# Altium PCB 超声波接近电路3-21PcbDoc.PcbDoc
Units mil, origin at the board's own origin, x right, y up, seen from the top; angles counter-clockwise.
Board outline 2495 x 1260 mil, 2 copper layers (Top Layer 1, Bottom Layer 1), stack 26.556 mil thick; 50 components, 104 nets, 237 pads, 87 vias.
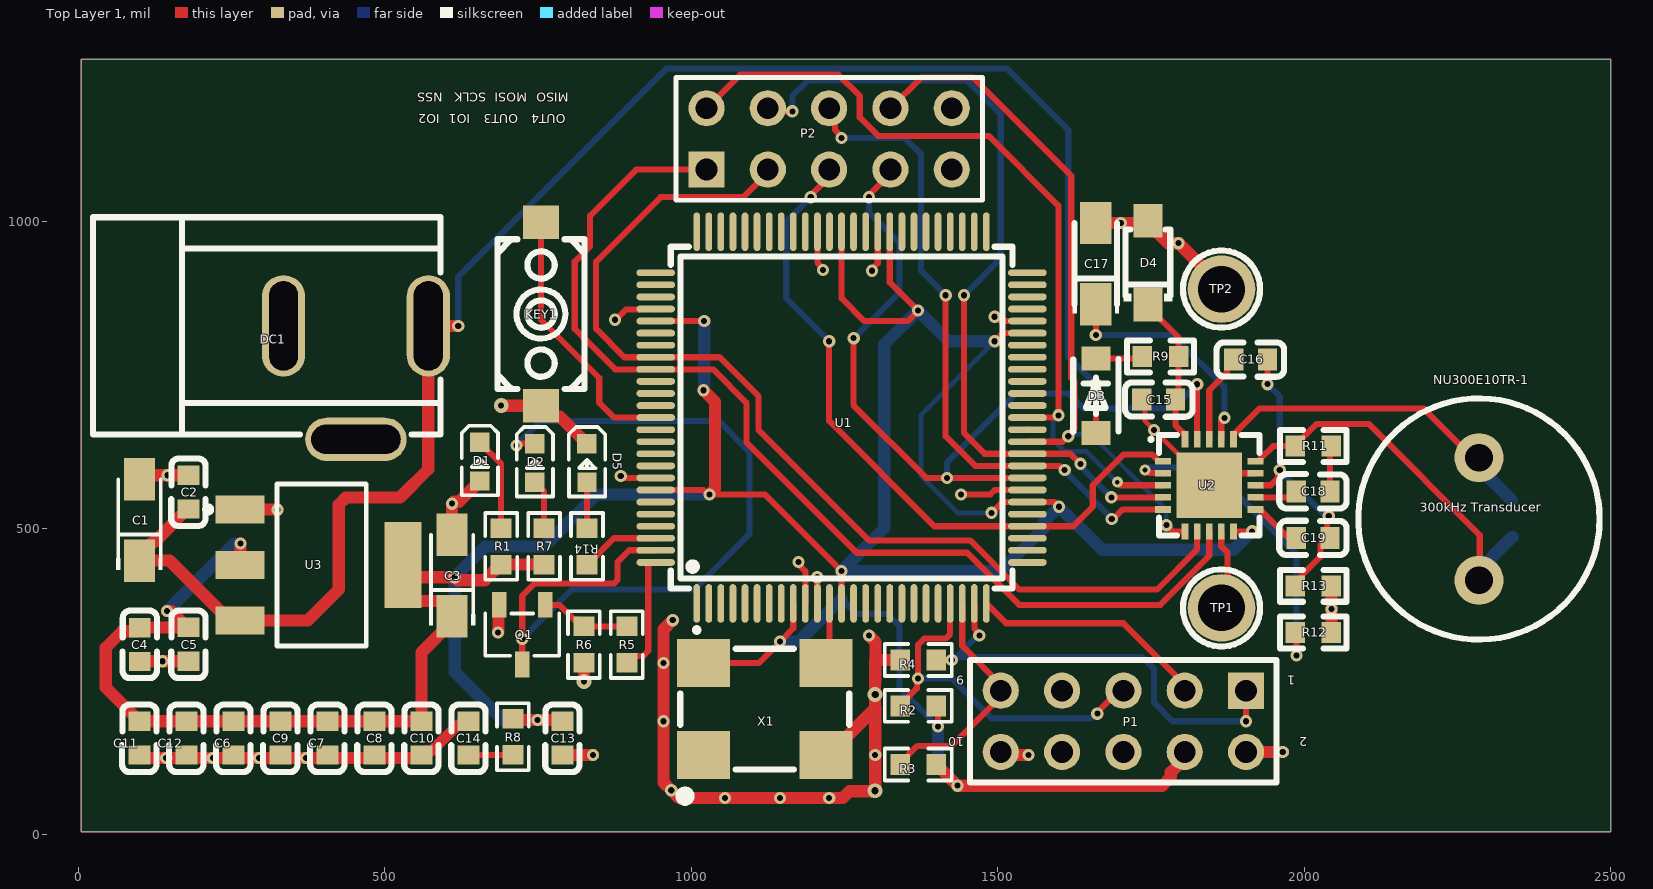
[diagram p0: Top Layer 1 view]
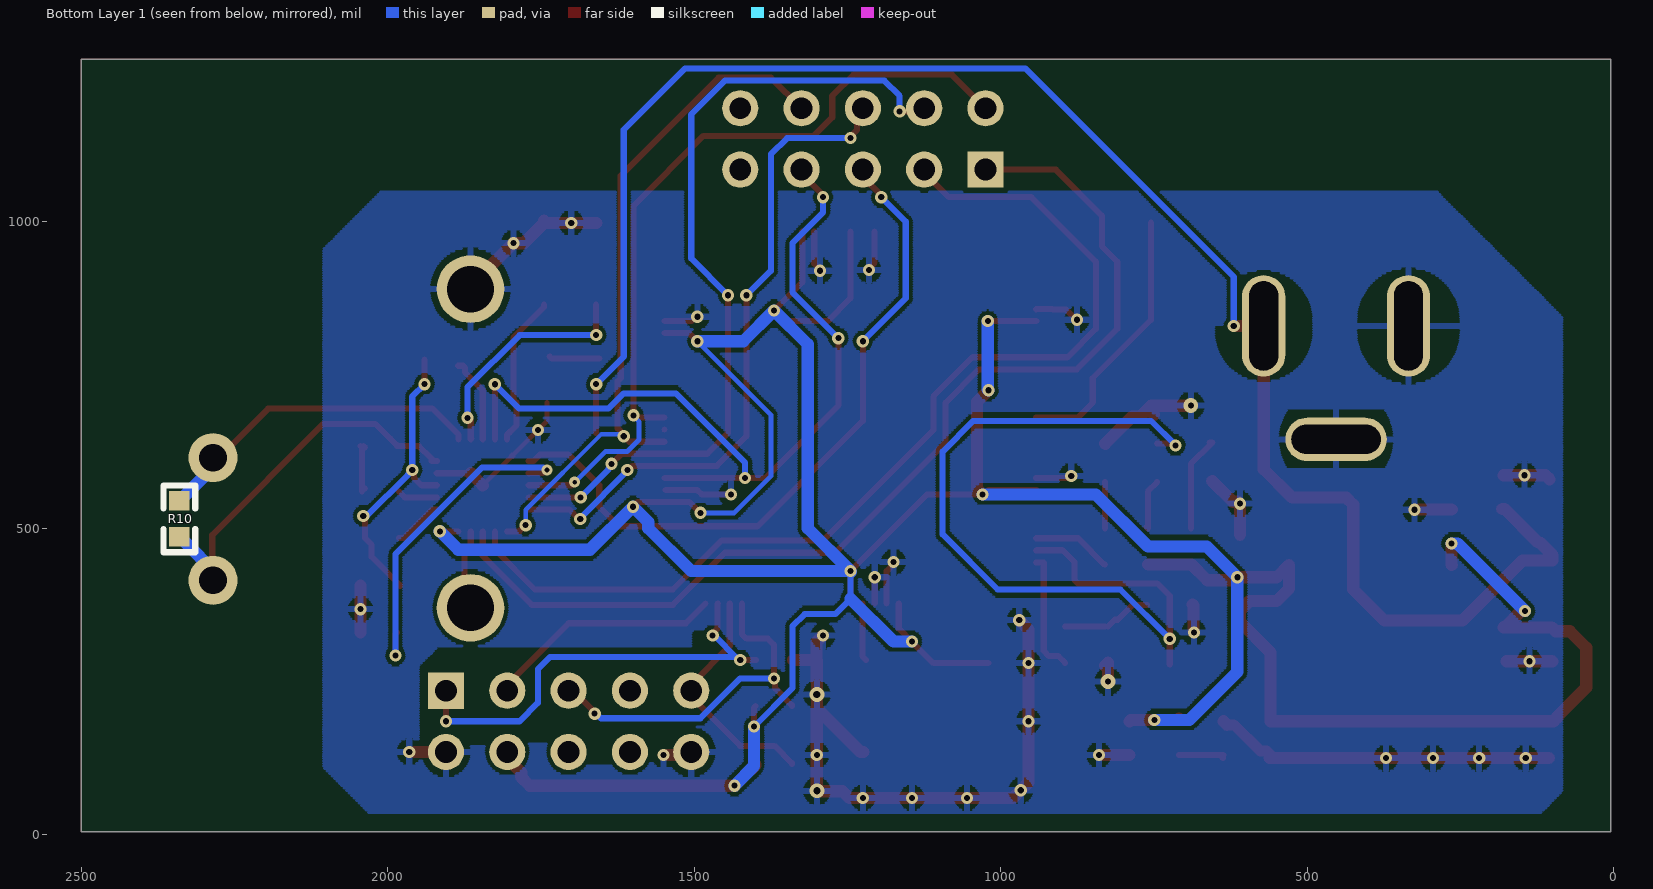
[diagram p1: Bottom Layer 1 view, seen from below]

## Layer stack, top to bottom
Top Solder: solder mask 0.4, Solder Resist, Dk 3.5
Top Layer 1: signal copper 1.378
Dielectric 4: prepreg 2.8, PP-006, Dk 4.1
Dielectric 2: prepreg 2.8, PP-006, Dk 4.1
Dielectric 1: dielectric 12.6, FR-4, Dk 4.8
Dielectric 3: prepreg 2.8, PP-006, Dk 4.1
Dielectric 5: prepreg 2.8, PP-006, Dk 4.1
Bottom Layer 1: signal copper 1.378
Bottom Solder: solder mask 0.4, Solder Resist, Dk 3.5

## Board outline
5,5 2500,5 2500,1265 5,1265

## Design rules (kind name [scope] priority, off if disabled: settings)
Clearance [All] p1: gap=6 ignorepadtopadclearanceinfootprint=FALSE except(0: Arc-Hole Track-Hole SMDPad-Hole THPad-Hole Via-Hole Fill-Hole Poly-Hole Region-Hole Text-Hole)
PolygonConnect [All] p1: connectstyle=Relief reliefconductorwidth=10 reliefentries=4 polygonreliefangle="90 Angle" airgapwidth=10
RoomDefinition 超声波接近电路3-21 [InComponentClass('超声波接近电路3-21')] p1: confinementstyle=ConfineIn formatcopy=TRUE lockcomponents=FALSE outline -4235,-1000 -2235,-1000 -2235,0 -4235,0
RoutingVias [All] p1: holewidth=28 width=50 viastyle="Through Hole" minholewidth=28 minwidth=50 maxholewidth=28 maxwidth=50
SolderMaskExpansion [All] p1: expansion=4 istentingtop=FALSE
Width PWR_Width [InNet('VCC3.3')] p1: maxlimit=20 minlimit=20 preferedwidth=20
Width GND_Width [InNet('GND')] p2: maxlimit=20 minlimit=20 preferedwidth=20
Width NORMAL [All] p3: maxlimit=10 minlimit=10 preferedwidth=10
30 further rules are at their usual default settings.

## Components (designator, comment, footprint, x,y, rotation, side; value= is the part's Value field where it differs from the comment)
"300kHz Transducer" "NU300E10TR-1" NU300E10TR-1 2285,415 r0 top
C1 "100uF" CAP-SMD_L3.2-W1.6-RD 100,457.22 r90 top
C2 "100nF" C0603 180,531.32 r90 top
C3 "100uF" CAP-SMD_L3.2-W1.6-RD 610,366.5 r90 top
C4 "100nF" C0603 100.46,337.7 r270 top
C5 "10nF" C0603 180,283.2 r90 top
C6 "10nF" C0603 253.33,130 r90 top
C7 "10nF" C0603 406.67,130 r90 top
C8 "10nF" C0603 483.33,130 r90 top
C9 "10nF" C0603 330,130 r90 top
C10 "10nF" C0603 560,130 r90 top
C11 "10nF" C0603 100,130 r90 top
C12 "10nF" C0603 176.67,130 r90 top
C13 "100nF" C0603 790,130 r90 top
C14 "100nF" C0603 636.67,130 r90 top
C15 "100nF" C0603 1790,710 r180 top
C16 "3.3nF" C0603 1884.89,775 r0 top
C17 "2.2uF" CAP-SMD_L3.2-W1.6-RD 1660,875 r90 top
C18 "330pF" C0603 1986.91,559.95 r0 top
C19 "15nF" C0603 1986.91,483.95 r0 top
D1 "LED0" LED0603-RD_RED 540,680 r270 top
D2 "MHT192UGCT" LED0603-RD_GREEN 704.72,677.95 r270 top
D3 "1N4001W" SOD-123F_L2.8-W1.8-LS3.7-RD 1465,695 r270 top
D4 "SMF36A_C353286" SOD-123FL_L2.7-W1.8-LS3.8-RD -1945.81,6041.63 r90 top
D5 "MHT192UGCT" LED0603-RD_GREEN 789.72,677.95 r270 top
DC1 "DC-005-2.5A-2.5" CONN-TH_DC-005-2.5A-2.0 335,830 r0 top
KEY1 "K2-3.6×6.1_SMD" KEY-SMD_2P-L6.2-W3.6-LS8.0 755,849.31 r270 top
P1 "Header 5X2" HDR2X5 1905,235 r180 top
P2 "Header 5X2" HDR2X5 1025,1085 r0 top locked
Q1 "BC817-40,215" SOT-23-3_L2.9-W1.6-P1.90-LS2.8-BR 50723.47,-27657.24 r90 top
R1 "1KΩ" R0603 650,615 r270 top
R2 "1KΩ" R0603 1225.69,170.13 r0 top
R3 "1KΩ" R0603 1225.69,74.51 r0 top
R4 "1KΩ" R0603 1225.69,245 r0 top
R5 "470Ω" R0603 935,165.57 r90 top
R6 "20kΩ" R0603 865,165.57 r90 top
R7 "4.7kΩ" R0603 720,615 r270 top
R8 "1KΩ" R0603 749.17,15.09 r90 top
R9 "10Ω" R0603 1620.69,740 r0 top
R10 "10kΩ" R0603 2300,370.69 r90 bottom
R11 "200Ω" R0603 2159.31,674.01 r180 top
R12 "0Ω" R0603 1870,290 r0 top
R13 "0Ω" R0603 1870,366 r0 top
R14 "1KΩ" R0603 790,615 r270 top
TP1 "5009" TEST-TH_BD3.18-P1.93 1905,330 r0 top
TP2 "5009" TEST-TH_BD3.18-P1.93 1905,850 r0 top
U1 "EPM240T100C5N" TQFP-100_L14.0-W14.0-P0.50-LS16.0-BL 1360,620 r0 top locked
U2 "TUSS4470TRTJR" QFN-20_L4.0-W4.0-P0.50-TL-EP2.7 -46561.58,-47901.66 r0 top
U3 "REG1117-3" ZZ311 335,400 r270 top
X1 "24MHz" OSC-SMD_4P-L7.0-W5.0-BL_SIT1602 1060,-65 r0 top

## Footprints (in the part's own frame and the unit in brackets; to place one, negate y for a bottom-side part, rotate by r counter-clockwise, add the part's x,y. Pads: shape width x height; smd on the part's side, far side on the other; paste and mask are expansions set on the pad)
C0603 [mm]
  rect 0.8x0.9 smd: 1(0,0) 2(1.4,0)
  silkscreen extent -0.71,-0.71 2.09,0.72
CAP-SMD_L3.2-W1.6-RD [mil]
  rect 69.19x51.02 smd: 1(-10,0) 2(122.78,0)
  silkscreen extent -25,-37 122,37
CONN-TH_DC-005-2.5A-2.0 [mm]
  oval 1.8x4.2 hole 1.2 slot 3.7 at 90 deg: 1(5.999,0) 2(0,0)
  oval 4.2x1.8 hole 1.2 slot 3.7 at 0 deg: 3(3,-4.7)
  silkscreen extent -7.9,-4.5 6.5,4.5
HDR2X5 [mm] "Connector; Header; 5x2 Position"
  rect 1.5x1.5 hole 0.9: 1(0,0)
  round 1.5 hole 0.9: 2(0,2.54) 3(2.54,0) 4(2.54,2.54) 5(5.08,0) 6(5.08,2.54) 7(7.62,0) 8(7.62,2.54) 9(10.16,0) 10(10.16,2.54)
  silkscreen extent -1.27,-1.27 11.43,3.81
KEY-SMD_2P-L6.2-W3.6-LS8.0 [mm]
  rect 1.4x1.5 smd: 1(-3.8,0) 2(3.8,0)
  silkscreen extent -3.1,-1.8 3.1,1.8
LED0603-RD_GREEN [mm]
  rect 0.8x0.8 smd: 1(1.016,1.016) 2(2.615,1.023)
  silkscreen extent 0.33,0.27 3.21,1.78
LED0603-RD_RED [mm]
  rect 0.8x0.8 smd: 1(1.016,2.921) 2(2.615,2.928)
  silkscreen extent 0.33,2.18 3.21,3.68
NU300E10TR-1 [mil]
  round 80 hole 45: 1(0,200) 2(0,0)
  silkscreen extent -197,-97 197,297
OSC-SMD_4P-L7.0-W5.0-BL_SIT1602 [mil]
  rect 86.61x78.74 smd: 1(-40,195) 2(160,195) 3(160,345) 4(-40,345)
  silkscreen extent -78,120 198,368
QFN-20_L4.0-W4.0-P0.50-TL-EP2.7 [mm]
  rect 0.665x0.28 smd: 1(1227.62,1232.18) 2(1227.62,1231.68) 3(1227.62,1231.18) 4(1227.62,1230.68) 5(1227.62,1230.18) 11(1231.435,1230.18) 12(1231.435,1230.68) 13(1231.435,1231.18) 14(1231.435,1231.68) 15(1231.435,1232.18)
  rect 0.28x0.665 smd: 6(1228.527,1229.273) 7(1229.027,1229.273) 8(1229.527,1229.273) 9(1230.027,1229.273) 10(1230.527,1229.273) 16(1230.527,1233.088) 17(1230.027,1233.088) 18(1229.527,1233.088) 19(1229.027,1233.088) 20(1228.527,1233.088)
  rect 2.7x2.7 smd: 21(1229.527,1231.18)
  silkscreen extent 1227.04,1229.1 1231.6,1233.26
R0603 [mil]
  rect 31.75x34.02 smd: 1(115,40) 2(174.31,40)
  silkscreen extent 90,14 199,66
SOD-123F_L2.8-W1.8-LS3.7-RD [mm]
  rect 1x1.2 smd: 1(-2.084,4.953) 2(1.016,4.953)
  silkscreen extent -2.05,4.02 0.96,5.9
SOD-123FL_L2.7-W1.8-LS3.8-RD [mm]
  rect 1.4x1.2 smd: 1(-131.486,-93.747) 2(-128.017,-93.747)
  silkscreen extent -131.36,-94.75 -128.38,-92.74
SOT-23-3_L2.9-W1.6-P1.90-LS2.8-BR [mm]
  rect 1.07x0.6 smd: 1(712.019,1269.025) 2(712.019,1270.925) 3(709.549,1269.975)
  silkscreen extent 709.91,1268.44 711.66,1271.51
TEST-TH_BD3.18-P1.93 [mm]
  round 2.8 hole 1.93: 1(-1.016,1.016)
  silkscreen extent -2.62,-0.58 0.58,2.61
TQFP-100_L14.0-W14.0-P0.50-LS16.0-BL [mm]
  oval 0.28x1.6 smd: 1(-8.915,-6.166) 2(-8.415,-6.166) 3(-7.915,-6.166) 4(-7.415,-6.166) 5(-6.915,-6.166) 6(-6.415,-6.166) 7(-5.915,-6.166) 8(-5.415,-6.166) 9(-4.915,-6.166) 10(-4.415,-6.166) 11(-3.915,-6.166) 12(-3.415,-6.166) 13(-2.915,-6.166) 14(-2.415,-6.166) 15(-1.915,-6.166) 16(-1.415,-6.166) 17(-0.915,-6.166) 18(-0.415,-6.166) 19(0.085,-6.166) 20(0.585,-6.166) 21(1.085,-6.166) 22(1.585,-6.166) 23(2.085,-6.166) 24(2.585,-6.166) 25(3.085,-6.166) 51(3.085,9.234) 52(2.585,9.234) 53(2.085,9.234) 54(1.585,9.234) 55(1.085,9.234) 56(0.585,9.234) 57(0.085,9.234) 58(-0.415,9.234) 59(-0.915,9.234) 60(-1.415,9.234) 61(-1.915,9.234) 62(-2.415,9.234) 63(-2.915,9.234) 64(-3.415,9.234) 65(-3.915,9.234) 66(-4.415,9.234) 67(-4.915,9.234) 68(-5.415,9.234) 69(-5.915,9.234) 70(-6.415,9.234) 71(-6.915,9.234) 72(-7.415,9.234) 73(-7.915,9.234) 74(-8.415,9.234) 75(-8.915,9.234)
  oval 1.6x0.28 smd: 26(4.785,-4.466) 27(4.785,-3.966) 28(4.785,-3.466) 29(4.785,-2.966) 30(4.785,-2.466) 31(4.785,-1.966) 32(4.785,-1.466) 33(4.785,-0.966) 34(4.785,-0.466) 35(4.785,0.034) 36(4.785,0.534) 37(4.785,1.034) 38(4.785,1.534) 39(4.785,2.034) 40(4.785,2.534) 41(4.785,3.034) 42(4.785,3.534) 43(4.785,4.034) 44(4.785,4.534) 45(4.785,5.034) 46(4.785,5.534) 47(4.785,6.034) 48(4.785,6.534) 49(4.785,7.034) 50(4.785,7.534) 76(-10.615,7.534) 77(-10.615,7.034) 78(-10.615,6.534) 79(-10.615,6.034) 80(-10.615,5.534) 81(-10.615,5.034) 82(-10.615,4.534) 83(-10.615,4.034) 84(-10.615,3.534) 85(-10.615,3.034) 86(-10.615,2.534) 87(-10.615,2.034) 88(-10.615,1.534) 89(-10.615,1.034) 90(-10.615,0.534) 91(-10.615,0.034) 92(-10.615,-0.466) 93(-10.615,-0.966) 94(-10.615,-1.466) 95(-10.615,-1.966) 96(-10.615,-2.466) 97(-10.615,-2.966) 98(-10.615,-3.466) 99(-10.615,-3.966) 100(-10.615,-4.466)
  silkscreen extent -9.99,-7.37 4.16,8.61
ZZ311 [mil]
  rect 45x80 smd: 1(-130.55,-70.74) 2(-40,-70.74) 3(50.55,-70.74)
  rect 140x60 smd: 4(-40,195)
  silkscreen extent -172,-128 92,135

## Part data
C1 C3: library part 100uF_1, "Polarized Capacitor (Radial)", LatestRevisionDate=17-Jul-2002, LatestRevisionNote="Re-released for DXP Platform.", PackageReference=RB7.6-15, Published=8-Jun-2000, Publisher="Altium Limited"
C2 C4 C5 C6 C7 C8 C9 C10 C11 C12 C13: "Capacitor", LatestRevisionDate=17-Jul-2002, LatestRevisionNote="Re-released for DXP Platform.", PackageReference=RAD-0.3, Published=8-Jun-2000, Publisher="Altium Limited"
C15: BOM_JLCPCB Part Class="Basic Part", BOM_Manufacturer=YAGEO, BOM_Manufacturer Part=CC0603KRX7R9BB104, BOM_Supplier=LCSC, BOM_Supplier Part=C14663, nameAlias=Capacitance, spicePre=C, spiceSymbolName=CC0603KRX7R9BB104
C16: BOM_JLCPCB Part Class="Extended Part", BOM_Manufacturer=MuRata, BOM_Manufacturer Part=GRM1885C1H332JA01D, BOM_Supplier=LCSC, BOM_Supplier Part=C77036, nameAlias=Capacitance, spicePre=C, spiceSymbolName=GRM1885C1H332JA01D
C17: library part 2.2uF_1, BOM_JLCPCB Part Class="Extended Part", BOM_Manufacturer=KEMET, BOM_Manufacturer Part=T491A225K035AT, BOM_Supplier=LCSC, BOM_Supplier Part=C122264, Contributor=LCSC, nameAlias=Capacitance, spicePre=C, spiceSymbolName=T491A225K035AT
C18: BOM_JLCPCB Part Class="Basic Part", BOM_Manufacturer=SAMSUNG, BOM_Manufacturer Part=CL10C331JB8NNNC, BOM_Supplier=LCSC, BOM_Supplier Part=C1664, nameAlias=Capacitance, spicePre=C, spiceSymbolName=CL10C331JB8NNNC
C19: BOM_JLCPCB Part Class="Extended Part", BOM_Manufacturer=YAGEO, BOM_Manufacturer Part=CC0603JRX7R9BB153, BOM_Supplier=LCSC, BOM_Supplier Part=C519550, Contributor=LCSC, nameAlias=Capacitance, spicePre=C, spiceSymbolName=CC0603JRX7R9BB153
D1: "Typical INFRARED GaAs LED", LatestRevisionDate=08-Jul-2005, LatestRevisionNote="Mech Layer 1 removed.", PackageReference=LED-0, Published=8-Jun-2000, Publisher="Altium Limited"
D2 D5: BOM_JLCPCB Part Class="Extended Part", BOM_Manufacturer=MEIHUA, BOM_Manufacturer Part=MHT192UGCT, BOM_Supplier=LCSC, BOM_Supplier Part=C389519, Contributor=LCSC, spicePre=L, spiceSymbolName=MHT192UGCT
D3: BOM_JLCPCB Part Class="Extended Part", BOM_Manufacturer=Jingdao, BOM_Manufacturer Part=1N4001W, BOM_Supplier=LCSC, BOM_Supplier Part=C162732, Contributor=LCSC, spicePre=D, spiceSymbolName=1N4001W
D4: BOM_JLCPCB Part Class="Extended Part", BOM_Manufacturer="Shandong Jingdao Microelectronics", BOM_Manufacturer Part=SMF36A, BOM_Supplier=LCSC, BOM_Supplier Part=C353286, Contributor=LCSC, spicePre=D, spiceSymbolName=SMF36A_C353286
DC1: BOM_JLCPCB Part Class="Extended Part", BOM_Manufacturer="XKB Enterprise", BOM_Manufacturer Part=DC-005-2.5A-2.5, BOM_Supplier=LCSC, BOM_Supplier Part=C319098, Contributor=LCSC, spicePre=D, spiceSymbolName=DC-005-2.5A-2.5
KEY1: BOM_Manufacturer Part=K2-1107ST-A4SW-06, BOM_Supplier=LCSC, BOM_Supplier Part=C118141, Contributor=LCEDA_Lib, spicePre=K, spiceSymbolName=K2-3.6×6.1_SMD, 制造商=韩国韩荣
P1 P2: "Header, 5-Pin, Dual row", LatestRevisionDate=17-Jul-2002, LatestRevisionNote="Re-released for DXP Platform.", Publisher="Altium Limited"
Q1: BOM_JLCPCB Part Class="Extended Part", BOM_Manufacturer=Nexperia, BOM_Manufacturer Part=BC817-40,215, BOM_Supplier=LCSC, BOM_Supplier Part=C52801, spicePre=Q, spiceSymbolName=BC817-40,215
R1 R2 R3 R4 R8 R14: "Resistor", LatestRevisionDate=17-Jul-2002, LatestRevisionNote="Re-released for DXP Platform.", PackageReference=AXIAL-0.4, Published=8-Jun-2000, Publisher="Altium Limited"
R5: BOM_JLCPCB Part Class="Extended Part", BOM_Manufacturer=UniOhm, BOM_Manufacturer Part=0603WAJ0471T5E, Resistance (Ohms)=470, BOM_Supplier=LCSC, BOM_Supplier Part=C25241, nameAlias=Resistance, spicePre=R, spiceSymbolName=0603WAJ0471T5E
R6: BOM_JLCPCB Part Class="Basic Part", BOM_Manufacturer=UniOhm, BOM_Manufacturer Part=0603WAF2002T5E, Resistance (Ohms)=20K, BOM_Supplier=LCSC, BOM_Supplier Part=C4184, nameAlias=Resistance, spicePre=R, spiceSymbolName=0603WAF2002T5E
R7: BOM_JLCPCB Part Class="Basic Part", BOM_Manufacturer=UniOhm, BOM_Manufacturer Part=0603WAF4701T5E, Resistance (Ohms)=4.7K, BOM_Supplier=LCSC, BOM_Supplier Part=C23162, nameAlias=Resistance, spicePre=R, spiceSymbolName=0603WAF4701T5E
R9: BOM_JLCPCB Part Class="Extended Part", BOM_Manufacturer=PANASONIC, BOM_Manufacturer Part=ERJPA3J100V, Resistance (Ohms)=10, BOM_Supplier=LCSC, BOM_Supplier Part=C441879, Contributor=LCSC, nameAlias=Resistance, spicePre=R, spiceSymbolName=ERJPA3J100V
R10: BOM_JLCPCB Part Class="Basic Part", BOM_Manufacturer=UniOhm, BOM_Manufacturer Part=0603WAF1002T5E, Resistance (Ohms)=10K, BOM_Supplier=LCSC, BOM_Supplier Part=C25804, nameAlias=Resistance, spicePre=R, spiceSymbolName=0603WAF1002T5E
R11: BOM_JLCPCB Part Class="Extended Part", BOM_Manufacturer=PANASONIC, BOM_Manufacturer Part=ERJ-PA3F2000V, Resistance (Ohms)=200, BOM_Supplier=LCSC, BOM_Supplier Part=C254528, Contributor=LCSC, nameAlias=Resistance, spicePre=R, spiceSymbolName=ERJ-PA3F2000V
R12 R13: library part 0_1, BOM_JLCPCB Part Class="Extended Part", BOM_Manufacturer=YAGEO, BOM_Manufacturer Part=RC0603JR-070RL, BOM_Supplier=LCSC, BOM_Supplier Part=C95177, nameAlias="Resistance (Ohms)", Resistance=0Ω, spicePre=R, spiceSymbolName=RC0603JR-070RL
TP1 TP2: BOM_JLCPCB Part Class="Extended Part", BOM_Manufacturer=Keystone, BOM_Manufacturer Part=5009, BOM_Supplier=LCSC, BOM_Supplier Part=C238126, Contributor=LCSC, spicePre=U, spiceSymbolName=5009
U1: "MAX II 3.3/2.5V CPLD, 80 IOs, 240 Logic Elements, 100-Pin Plastic TQFP, Commercial Temperature, Speed Grade 5, Pb-Free", Supplier Part Number 1=544-1964-ND, Code_JEDEC=MS-026-AED, ComponentLink1Description="Manufacturer Link", ComponentLink1URL=http://www.altera.com/products/devices/cpld/max2/mx2-index.jsp, ComponentLink2Description=Handbook, ComponentLink2URL=http://www.altera.com/literature/hb/max2/max2_mii5v1.pdf, ComponentLink3Description="Packaging Specification", ComponentLink3URL=http://www.altera.com/literature/ds/dspkg.pdf, DatasheetVersion="ver1.8, Jul-2006", LatestRevisionDate=13-Apr-2006, LatestRevisionNote="IPC-7351 Footprint Added.", Note="Each set of VCCIO pins can be connected to 3.3V, 2.5V, 1.8V, or 1.5V.", PackageDescription="100-Pin Plastic Thin Quad Flat Pack (TQFP100) - Wire Bond", PackageReference=TQFP100, PackageVersion="ver15.1, May-2008", Published=4-Mar-2005, Publisher="Altium Limited", Supplier 1=Digi-Key, Supplier 2=Farnell, Supplier 3=Farnell, Supplier Part Number 2=1662268, Supplier Part Number 3=1453503
U2: library part CMP-0081414-4, "Ultrasonic Sensor Signal Conditioner IC for Directly", Alternate Manufacturer="Texas Instruments", Alternate PartNumber=PGA44801RTJT, AEC Category=Q200, AEC Qualified=N, ComponentLink1Description="Datasheet Link", ComponentLink1URL=http://www.ti.com/lit/ds/symlink/pga448.pdf, ComponentLink2Description="Product Folder", ComponentLink2URL=http://www.ti.com/product/pga448, ComponentLink3Description="Online Datasheet", ComponentLink3URL=http://www.ti.com/product/pga448/datasheet, CompType=IC, Manufacturer="Texas Instruments", MountType=SMT, PackageDescription=WQFN-20, PackageReference=RTJ0020J, PartNumber=TUSS4470TRTJR, SizeArea_mm2=16, SizeAreaWB_mm2=25, SizeX_mm=4, SizeY_mm=4, SizeZ_mm=0.8
U3: "800mA Low Dropout Positive Regulator Fixed 2.85V,3V,3.3V and 5V", ComponentLink1Description="Manufacturer Link", ComponentLink1URL=http://www.ti.com/, ComponentLink2Description=Datasheet, ComponentLink2URL=http://www-s.ti.com/sc/ds/reg1117.pdf, DatasheetVersion=1994, LatestRevisionDate=17-Jul-2002, LatestRevisionNote="Re-released for DXP Platform.", PackageDescription="SOT-223/SC-73; 4 Leads; Body 6.7 x 7.3 mm, inc. leads (LxW max)", PackageReference=ZZ311, PackageVersion=revC, Published=8-Jun-2000, Publisher="Altium Limited"
X1: library part oscillator
C14: Contributor=LCEDA_Lib, nameAlias=Value(F), spicePre=C, spiceSymbolName=C_0603_US

## Via types
v1: diameter 20, hole 10, Top Layer 1 to Bottom Layer 1, tented both sides, 51 vias
v2: diameter 20, hole 10, Top Layer 1 to Bottom Layer 1, 30 vias
v3: diameter 24, hole 10, Top Layer 1 to Bottom Layer 1, 2 vias
v4: diameter 24, hole 12, Top Layer 1 to Bottom Layer 1, 2 vias
v5: diameter 18, hole 8, Top Layer 1 to Bottom Layer 1, tented both sides, 2 vias

## Nets (pads, with @x,y where several pads share a name; then routed paths per layer and width w, separated by ;. In a path a pad name is that pad's centre, name@x,y a point inside that pad or via, vN(x,y) a via of type N, cw(c..) or ccw(c..) an arc to the next point about the centre after c; other vN are vias at no path point)
DGND: R12.1 U2.2 | length 535.6
  Top Layer 1 w10: v5(1740,595) 1742.16,595 1746.97,590.2 1769.39,590.2 U2.2 ; R12.1 1987.5,327.5 v1(1987.5,292.5)
  Bottom Layer 1 w10: v5@1746.21,599.04 1845.96,599.04 1987.5,457.5 v1(1987.5,292.5)
GND: C1.2 C2.2 C3.2 C4.2 C5.1 C6.1 C7.1 C8.1 C9.1 C10.1 C11.1 C12.1 C13.1 C14.2 C15.2 C17.2 D1.2 D4.2 D5.1 DC1.2 DC1.3 KEY1.2 P1.2 P1.10 Q1.2 R4.1 R6.1 R12.2 R13.2 TP2.1 U1.10 U1.11 U1.32 U1.46 U1.60 U1.65 U1.79 U1.93 U2.14 U2.21 U3.1 X1.2 | length 3466.8
  Top Layer 1 w8: C15.2@1739.89,705 1739.89,675.11 v1(1755,660) 1796.85,618.15 U2.21
  Top Layer 1 w10: v1(875.7,840) 877.11,840 894.08,856.97 915.23,856.97 915.62,857.37 941.8,857.37 U1.79@942.08,857.09 ; v1@885,581.97 U1.93 ; v1(1175,445) 1175,441.21 1186.17,430.04 U1.10 ; U1.11@1205.63,377.48 v1(1205.63,420) ; U1.65 1205.86,933.2 1215,924.06 v1(1215,921.35) ; v1(1295,920) 1295,922.71 1304.29,932 U1.60 ; v1(1440,555) 1487.71,555 1495,562.29 U1.32@1547.19,562.29 ; v1(1495,845) 1497.71,845 1504.63,838.08 1548.18,838.08 U1.46 ; U2.21@1864.69,589.68 U2.14
  Top Layer 1 w18: C10.1 566.75,136.75 576.75,136.75 619.36,179.36 C14.2@630.92,179.36
  Top Layer 1 w20: C4.2 100.76,282.9 v1(137.73,282.9) 174.7,282.9 C5.1@175,283.2 ; C1.2@105,580 111.43,586.43 v1(145.71,586.43) C2.2 ; C11.1@105.67,125 v1(143.69,125) 181.71,125 v1(219.73,125) v1(371.8,125) C10.1@561.89,125 ; U3.1 324.45,530.55 v1(325,530) ; C3.2 v1(610,540) 613.02,543.02 621.24,543.02 D1.2 ; C14.2@630.92,179.36 C14.2 ; v1(685,330) 685.77,330.77 685.77,373.7 Q1.2 ; v3(690,700) 690.3,699.7 KEY1.2 772.56,682.14 785.53,682.14 D5.1 ; KEY1.2@750.3,685 KEY1.2@755,689.7 ; C13.1 v1(840,130) ; v3(825,250) R6.1 R6.1@830,275.57 ; v1(970,350) 955,335 v1(955,280) v1(955,185) 955,85 v1(967.5,72.5) 980,60 v1(1055,60) v1(1145,60) v1(1225,60) 1247.2,60 1258.04,70.84 1299.13,70.84 v4(1299.89,71.61) 1300,71.72 v1(1300,130) 1300,207.28 1299.89,207.39 ; X1.2@1223.94,135 1228.94,135 1299.13,205.19 1299.13,206.63 1299.89,207.39 ; v1(1290,325) 1300.77,314.23 1300.77,285 R4.1@1338.87,285 ; 1300,285 1300,250 1299.95,249.95 v4(1299.95,228.7) 1299.95,207.45 1299.89,207.39 ; P1.10 1510,130 v1(1550,130) ; P1.10@1505,145 P1.10@1507.53,142.47 ; C17.2 v1(1700.58,997.78) D4.2@1741.17,997.78 ; D4.2 1745,997.67 1777.67,965 v1(1795,965) 1865,895 TP2.1 ; U2.21 U2.21@1864.69,589.68 ; P1.2 v1(1965,135) ; R12.2 v1(2044.31,368) R13.2
  other v1: 295,125 885,585
NetC14_1: C14.1 R8.1 | length 72.7
  Top Layer 1 w10: C14.1 709.08,130 R8.1 ; C14.1@637.93,125 C14.1@638.02,125.09
NetC15_1: C15.1 D4.1 R9.2 U2.20 | length 249.8
  Top Layer 1 w10: D4.1 1745,861.06 1795,811.06 R9.2 1795,710 1790,705 1790,667.28 1800.86,656.43 1801.88,656.43 1805.63,652.68 U2.20
NetC16_1: C16.1 U2.18 | length 141.1
  Top Layer 1 w10: U2.18 1845,725.11 1874.14,754.25 1874.14,762.28 1876.86,765 C16.1@1884.89,765
NetC17_1: C17.1 U2.17 | length 384.4
  Top Layer 1 w10: v1(1660,815) C17.1 ; U2.17@1863.18,646.61 U2.17 1864.69,674.68 v1(1870,680)
  Bottom Layer 1 w10: v1(1660,815) 1785,815 1870,730 v1(1870,680)
NetC18_1: C18.1 U2.12 | length 66.5
  Top Layer 1 w10: U2.12@1920.61,549.8 U2.12 1972.27,550.32 C18.1@1981.91,559.95
NetC18_2: C18.2 R11.1 | length 85.3
  Top Layer 1 w10: C18.2@2037.02,564.95 C18.2 2042.02,631.71 R11.1 ; R11.1@2037.02,631.71 R11.1@2039.31,634.01
NetC19_1: C19.1 U2.11 | length 81.1
  Top Layer 1 w10: U2.11 1927.68,530.63 1974.36,483.95 C19.1@1981.91,483.95
NetD1_1: D1.1 R1.1 | length 157.4
  Top Layer 1 w10: D1.1 D1.1@657.05,637.95 ; D1.1@659.1,640 D1.1@657.05,637.95 ; R1.1 690,605 D1.1@657.05,637.95
NetD2_2: D2.2 R7.1 | length 84.1
  Top Layer 1 w10: D2.2 760,560 R7.1 R7.1@762.05,502.05
NetD3_1: D3.1 R9.1 | length 81.9
  Top Layer 1 w10: D3.1@1655,777.05 1732.74,777.05 R9.1
NetD5_2: D5.2 R14.1 | length 75
  Top Layer 1 w10: R14.1 D5.2
NetQ1_1: Q1.1 R5.2 R6.2 | length 142.7
  Top Layer 1 w10: Q1.1 785,375 809.25,350.75 814.12,350.75 R6.2 ; R6.2@830,339.88 R5.2
P1: U1.1
P2: U1.2
P3: U1.3
P4: U1.4
P5: U1.5
P6: U1.6
P7: U1.7
P8: U1.8
P12: U1.12 X1.3 | length 94.5
  Top Layer 1 w10: X1.3@1220,285 1225.54,290.54 U1.12
P14: U1.14
P15: U1.15
P16: U1.16
P17: U1.17
P18: U1.18
P19: U1.19
P20: U1.20
P21: U1.21
P26: U1.26
P27: U1.27
P28: U1.28
P29: P2.5 U1.29 U2.1 | length 1157.3
  Top Layer 1 w10: v2(1195,1040) 1195,1042.71 1225,1072.71 P2.5 ; v2(1225,805) 1225,675 1396.77,503.23 U1.29 1623.23,503.23 1655,535 1655,570 1705,620 1751.69,620 1762.32,609.37 U2.1
  Bottom Layer 1 w10: v2(1195,1040) 1155,1000 1155,875 v2(1225,805)
P30: U1.30
P33: P2.7 U1.33 U2.19 | length 1380.1
  Top Layer 1 w10: v2(1265,810) 1265,700 1383.02,581.97 v2(1417.08,581.97) ; v2(1290,1040) 1290,1042.71 1325,1077.71 P2.7 ; v2(1417.08,581.97) U1.33 ; U2.19 v1(1825.26,734.74)
  Bottom Layer 1 w10: v2(1265,810) 1340,885 1340,965 1290,1015 v2(1290,1040) ; v2(1417.08,581.97) 1417.08,607.08 1530,720 1615,720 1640,695 1785.51,695 v1(1825.26,734.74)
P34: P2.6 U1.34 U2.5 | length 1093.5
  Top Layer 1 w10: P2.6 1234.39,1175.61 1234.39,1149.67 1245,1139.06 v2(1245,1136.35) ; v2(1415,880) 1415,650 1463.34,601.66 U1.34 1600.9,601.66 1607.56,595 v1(1609.19,595) ; v1(1686.08,515) 1688.25,515 1703.88,530.63 U2.5
  Bottom Layer 1 w10: v2(1245,1136.35) 1348.65,1136.35 1375,1110 1375,920 v2(1415,880) ; v1(1609.19,595) 1609.19,593.45 1686.08,516.55 v1(1686.08,515)
P35: P2.4 U1.35 U2.4 | length 1355.9
  Top Layer 1 w10: P2.4 1130,1180 v2(1165,1180) ; v2(1445,880) 1445,655 1478.66,621.34 U1.35 1618.66,621.34 v1(1635,605) ; v1(1685.29,550.29) U2.4
  Bottom Layer 1 w10: v2(1165,1180) 1165,1205 1190,1230 1450,1230 1505,1175 1505,940 v2(1445,880) ; v1(1635,605) 1635,602.29 1640,597.29 1640,595.57 v1(1685.29,550.29)
P36: P2.8 U1.36 U2.6 | length 1152.3
  Top Layer 1 w10: P2.8 1375,1235 1460,1235 1620,1075 1620,745 1625,740 1625,662.71 1615,652.71 v2(1615,650) 1606.03,641.03 U1.36 ; v1(1775,505) 1785.12,494.9 U2.6
  Bottom Layer 1 w7: v2@1617.16,653.47 1651.53,653.47 1775,530 v1(1775,505)
P37: U1.37 | length 0.3
  Top Layer 1 w10: U1.37 U1.37@1548.57,660.91
P38: P2.2 U1.38 U2.3 | length 1354
  Top Layer 1 w10: P2.2 1080,1240 1240,1240 1275,1205 1275,1170 1305,1140 1485,1140 1599.04,1025.96 v2(1599.04,684.04) 1596.34,684.04 1592.89,680.6 1548.57,680.6 U1.38 ; v5(1695,575) 1700,570 U2.3
  Bottom Layer 1 w8: v2(1599.04,684.04) 1599.04,682.4 1590,673.36 1590,644.69 1609.69,625 1645,625 1674.45,595.55 v5(1695,575)
P39: U1.39
P40: U1.40
P41: U1.41
P42: U1.42
P43: U1.43
P44: U1.44
P47: U1.47
P48: U1.48
P49: U1.49
P50: U1.50
P51: U1.51
P52: U1.52
P53: U1.53
P54: U1.54
P55: U1.55
P56: U1.56
P57: U1.57
P58: U1.58
P61: U1.61
P62: U1.62
P64: U1.64
P66: U1.66
P67: U1.67
P68: U1.68
P69: U1.69
P70: U1.70
P71: U1.71
P72: U1.72
P73: U1.73
P74: U1.74
P75: U1.75
P76: U1.76
P77: U1.77
P78: U1.78
P81: U1.81
P82: U1.82
P83: P2.3 U1.83 U2.7 | length 1700.3
  Top Layer 1 w10: P2.3 1125,1080 1085,1040 950,1040 845,935 845,825 891.18,778.83 U1.83 1046.18,778.83 1110,715 1110,660 1290,480 1455,480 1535,400 1760,400 1825.31,465.32 U2.7
P84: P2.1 U1.84 U2.8 | length 1748.9
  Top Layer 1 w10: P2.1 910,1085 835,1010 835,960 810,935 810,825 875.86,759.14 U1.84 1035.86,759.14 1090,705 1090,640 1270,460 1450,460 1535,375 1765,375 1845,455 U2.8
P85: U1.85
P86: U1.86
P87: U1.87
P88: KEY1.1 U1.88 | length 435.5
  Top Layer 1 w10: KEY1.1 755,840 850,745 850,705 874.6,680.4 U1.88
P89: U1.89
P90: U1.90
P91: U1.91
P92: U1.92
P95: U1.95
P96: U1.96
P97: U1.97
P98: R14.2 U1.98 | length 129.8
  Top Layer 1 w10: R14.2 831.13,440.69 873.99,483.55 U1.98
P99: D2.1 Q1.3 U1.99 | length 1401.8
  Top Layer 1 w10: v2(715,635) 717.95,637.95 D2.1 ; Q1.3 v1(724.47,319.47) 724.47,389.47 745,410 874.14,410 880,415.86 880,445 899.06,464.06 941.88,464.06 U1.99
  Bottom Layer 1 w10: v2(715,635) 755,675 1045,675 1095,625 1095,490 1005,400 805,400 v1(724.47,319.47)
P100: R5.1 U1.100 | length 199
  Top Layer 1 w10: R5.1 905.88,291.44 921.44,291.44 930,300 930,443.71 930.47,444.18 U1.100
SGND: C16.2 C19.2 R13.1 U2.13 | length 494.9
  Top Layer 1 w10: U2.13 1945,570 1957.32,582.32 1957.32,592.32 v1(1960,595) ; v1(1940,735) C16.2 ; R13.1@1980,406 1980,407.13 2026.27,453.4 2026.27,473.2 2037.02,483.95 2037.02,517.02 v1(2040,520)
  Bottom Layer 1 w10: v1(1940,735) 1960,715 v1(1960,595) 1965.6,589.4 1965.6,588.33 1967.59,586.33 ; 1967.61,586.31 2033.93,520 v1(2040,520)
TCK: P1.1 R4.2 U1.24 | length 758.5
  Top Layer 1 w10: R4.2@1399.31,285 v1(1425,285) ; U1.24 1461.96,377.05 1461.96,336.83 1470,328.79 v1(1470,325) ; v1(1905,185) P1.1@1905,245
  Bottom Layer 1 w10: v1(1425,285) v1@1426.53,286.53 ; v1(1470,325) 1467.5,325 1429.03,286.53 v1@1426.53,286.53 ; v1(1905,185) 1785,185 1755,215 1755,270 1735,290 1432.16,290 1428.7,286.53 v1@1426.53,286.53
TDI: P1.9 R3.1 U1.23 | length 388.6
  Top Layer 1 w10: R3.1@1340.69,115.64 1340.69,116.77 1368.92,145 1425,145 1505,225 1505,245 1442.08,307.92 U1.23
TDO: P1.3 U1.25 | length 378.3
  Top Layer 1 w10: U1.25 1513.7,345 1705,345 P1.3@1805,245
TMS: P1.5 R2.1 U1.22 | length 609.1
  Top Layer 1 w10: R2.1 1340.69,211.27 1368.09,238.66 1368.09,253.09 v1(1370,255) 1370,310 1380,320 1415,320 1422.39,327.39 U1.22 ; v1(1662.5,197.5) 1662.5,200 1700,237.5 1700,240 P1.5@1705,245
  Bottom Layer 1 w10: v1(1370,255) 1425,255 1490,190 1652.29,190 1659.79,197.5 v1(1662.5,197.5)
VCC: C1.1 C2.1 D3.2 DC1.1 U3.3 | length 2870.5
  Top Layer 1 w10: D3.2 v2(1660,735)
  Top Layer 1 w20: C2.1@181.97,531.32 C2.1 178.03,531.32 123.54,476.82 120.51,476.82 100,456.31 C1.1 148.99,447.22 246.76,349.45 U3.3 374.45,349.45 425,400 425,538.28 436.72,550 525,550 571.2,596.2 DC1.1 v2(620,830)
  Bottom Layer 1 w10: v2(620,830) 620,910 960,1250 1515,1250 1615,1150 1615,780 v2(1660,735)
VCC3.3: C3.1 C4.1 C5.2 C6.2 C7.2 C8.2 C9.2 C10.2 C11.2 C12.2 C13.2 P1.4 R1.2 R2.2 R3.2 R7.2 R8.2 U1.9 U1.13 U1.31 U1.45 U1.59 U1.63 U1.80 U1.94 U2.10 U3.2 U3.4 X1.4 | length 6939.1
  Top Layer 1 w10: U1.94 1020,562.29 1027.29,555 1028.65,555 v2(1030,555) 1120.27,555 v2(1245.23,430.04) U1.13 ; U1.80 v2(1021.18,837.88) ; X1.4 1110,280 v2(1145,315) 1166.49,336.49 U1.9 ; U1.63 1245.23,874.77 1282.12,837.88 1352.88,837.88 v2(1370,855) 1323.97,901.03 U1.59 ; R2.2 1402.57,207.57 v2(1402.57,176.49) ; v2(1490,525) 1507.6,542.6 U1.31 1592.4,542.6 v2(1600,535) ; v2(1495,805) 1508.19,818.19 U1.45 ; U2.10 v2(1915,494.9)
  Top Layer 1 w20: v2(145,365) 151.35,365 178.03,338.31 C5.2 179.7,338.01 100.76,338.01 94.71,331.96 71.96,331.96 45,305 45,240.11 92.28,192.83 92.28,190.86 98.03,185.11 C11.2 C12.2 C9.2 C10.2 560,297.42 610,347.42 C3.1 610,365.59 594.49,381.1 550,381.1 530,401.1 U3.4 550,420 v2(614.1,420) 619.1,415 663.18,415 688.87,440.69 R1.2 R7.2 ; U3.2 265,440.74 v2(265,475) ; R8.2 711.32,187.26 v2(749.59,187.26) 787.85,187.26 C13.2 ; v2(1020,725) 1038.83,706.17 1038.83,563.83 v2(1030,555) ; R3.2 1400,113.37 1405.88,107.5 1407.01,107.5 v2(1434.51,80) 1768.28,80 1782.43,94.14 1782.43,101.86 1805,124.43 P1.4
  Bottom Layer 1 w8: v2(1490,525) 1435,525 1375,585 1375,685 v2(1495,805)
  Bottom Layer 1 w10: v2(1245.23,430.04) 1245,429.81 1245,385 1270,360 1320,360 1340,340 1340,239.06 v2(1402.57,176.49)
  Bottom Layer 1 w20: v2(145,365) 255,475 v2(265,475) ; v2(749.59,187.26) 692.74,187.26 614.1,265.9 v2(614.1,420) 664.1,470 760,470 845,555 v2(1030,555) ; v2(1020,725) 1021.18,726.18 v2(1021.18,837.88) ; v2(1145,315) 1175,315 1245,385 ; v2@1244.34,429.16 v2@1245,429.81 ; v2(1402.57,176.49) 1402.57,111.94 v2(1434.51,80) ; v2(1495,805) 1420,805 v2(1370,855) 1315,800 1315,499.81 v2(1245.23,430.04) 1505.04,430.04 1575,500 1575,510 v2(1600,535) 1670,465 1885,465 1914.9,494.9 v2(1915,494.9)
VOUT: TP1.1 U2.9 | length 123.8
  Top Layer 1 w10: U2.9@1864.84,494.74 U2.9 1864.69,470.32 1875,460 1875,390 TP1.1@1865,380 ; TP1.1@1884.84,380.16 TP1.1@1885,380
X+: "300kHz Transducer.2" R10.1 R11.2 U2.15 | length 634.5
  Top Layer 1 w10: U2.15 1927.68,609.37 1928.19,609.88 1928.19,613.07 1949.12,634.01 R11.2 ; R11.2@1986.13,636.27 1995.88,646.01 1996.2,646.01 2020.19,670 2105,670 2286.25,488.75 2286.25,416.25 2285,415
  Bottom Layer 1 w20: 2285,415 2285,431.24 2306.09,452.32 2306.09,452.91 2338.87,485.69 R10.1
X-: "300kHz Transducer.1" R10.2 U2.16 | length 550.5
  Top Layer 1 w10: U2.16 1884.37,652.68 1926.69,695 2195,695 2280,610
  Bottom Layer 1 w10: 2285,598.87 2285,615 ; 2303.87,624.31 2305,624.31 ; R10.2@2338.87,545 R10.2
  Bottom Layer 1 w20: 2285,598.87 R10.2@2338.87,545
pads on no net: P1.6 P1.7 P1.8 P2.9 P2.10 X1.1
copper on no net: | length 7510
  Top Layer 1 w1: 5,5 5,1265 2500,1265 2500,5 5,5

## Polygon pours and split planes (outlines as drawn)
GND on Bottom Layer 1 "NONET_L-01_P-001" (hatched Horizontal grid 4 track 5, remove dead copper, pour order 0): 2010,1050 2105,955 2105,110 2030,35 120,35 85,70 85,845 290,1050

## Other copper
Bottom Layer 1:
  pour cut-out: 1490,280 1930,280 1945,265 1940,260 1940,200 1770,200 1735,165 1735,115 1580,115 1575,120 1582.5,127.5 1582.5,190 1475,190 1470,195 1470,265 1487.5,282.5
  pour cut-out: 1920,305 1950,275 1950,140 1570,160 1470,195 1465,275 1495,305
  pour cut-out: 1662.5,197.5 1692.5,197.5 1725,200 1725,170 1682.5,162.5 1657.5,187.5 1657.5,192.5
  pour cut-out: 1527.5,182.5 1557.5,182.5 1590,185 1590,155 1547.5,147.5 1522.5,172.5 1522.5,177.5
  pour cut-out: 1415,285 1400,270 1400,245 1430,245 1450,225 1485,225 1490,230 1490,280 1485,285
  pour cut-out: 1470,315 1460,305 1455,305 1465,295 1505,295 1505,330 1500,335 1470,335
  pour cut-out: 1645,615 1665,615 1705,575 1705,555 1700,550 1665,550 1645,570

## Silkscreen, mask and mechanical layers (free items; w line width, h text height)
Top Overlay:
  text "NSS" at 595,1215 h25 r180
  text "SCLK" at 665.56,1215 h25 r180
  text "MOSI" at 732.28,1215 h25 r180
  text "MISO" at 800,1215 h25 r180
  text "IO2" at 590,1180 h25 r180
  text "IO1" at 639.94,1180 h25 r180
  text "OUT3" at 717.5,1180 h25 r180
  text "OUT4" at 795,1180 h25 r180

## Text inside footprints (layer, text, board x,y; h text height)
P1: Top Overlay "10" at 1445,163.98 h25 r180; Top Overlay "9" at 1445,263.98 h25 r180; Top Overlay "1" at 1985,263.98 h25 r180; Top Overlay "2" at 2004.98,163.98 h25 r180